# EAGLE board v1 (EAGLE 7.7.0)
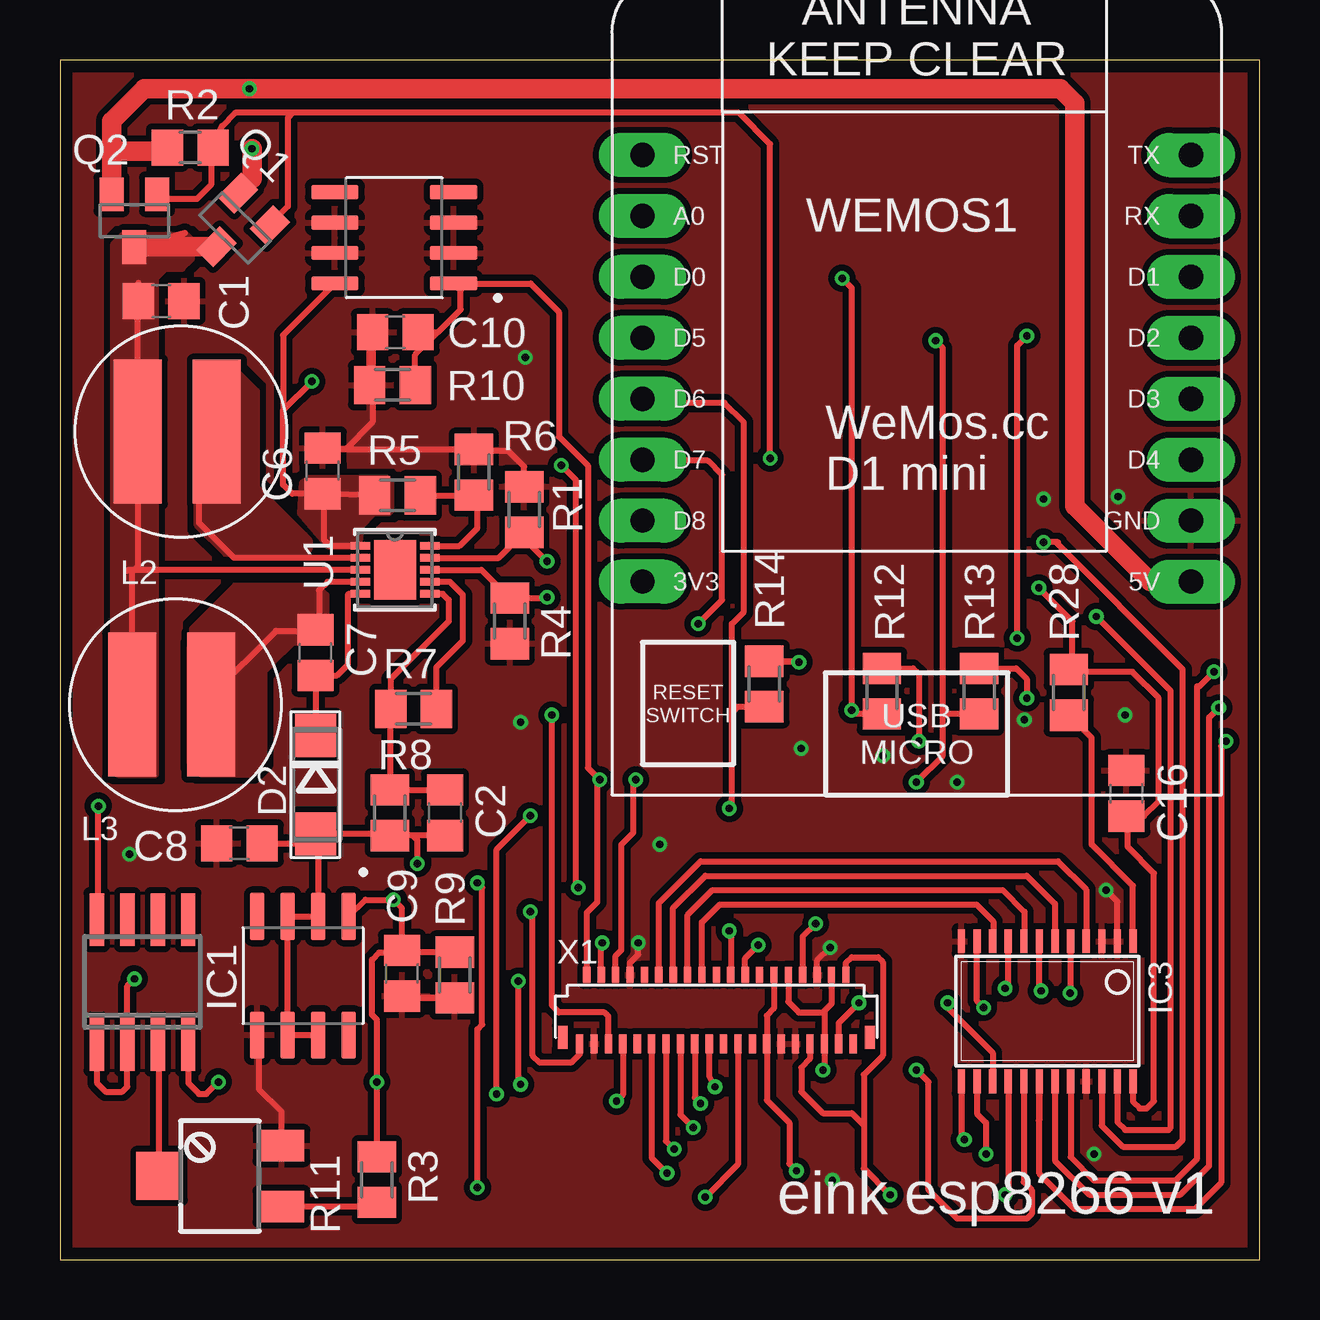
[diagram p0: board, top side]
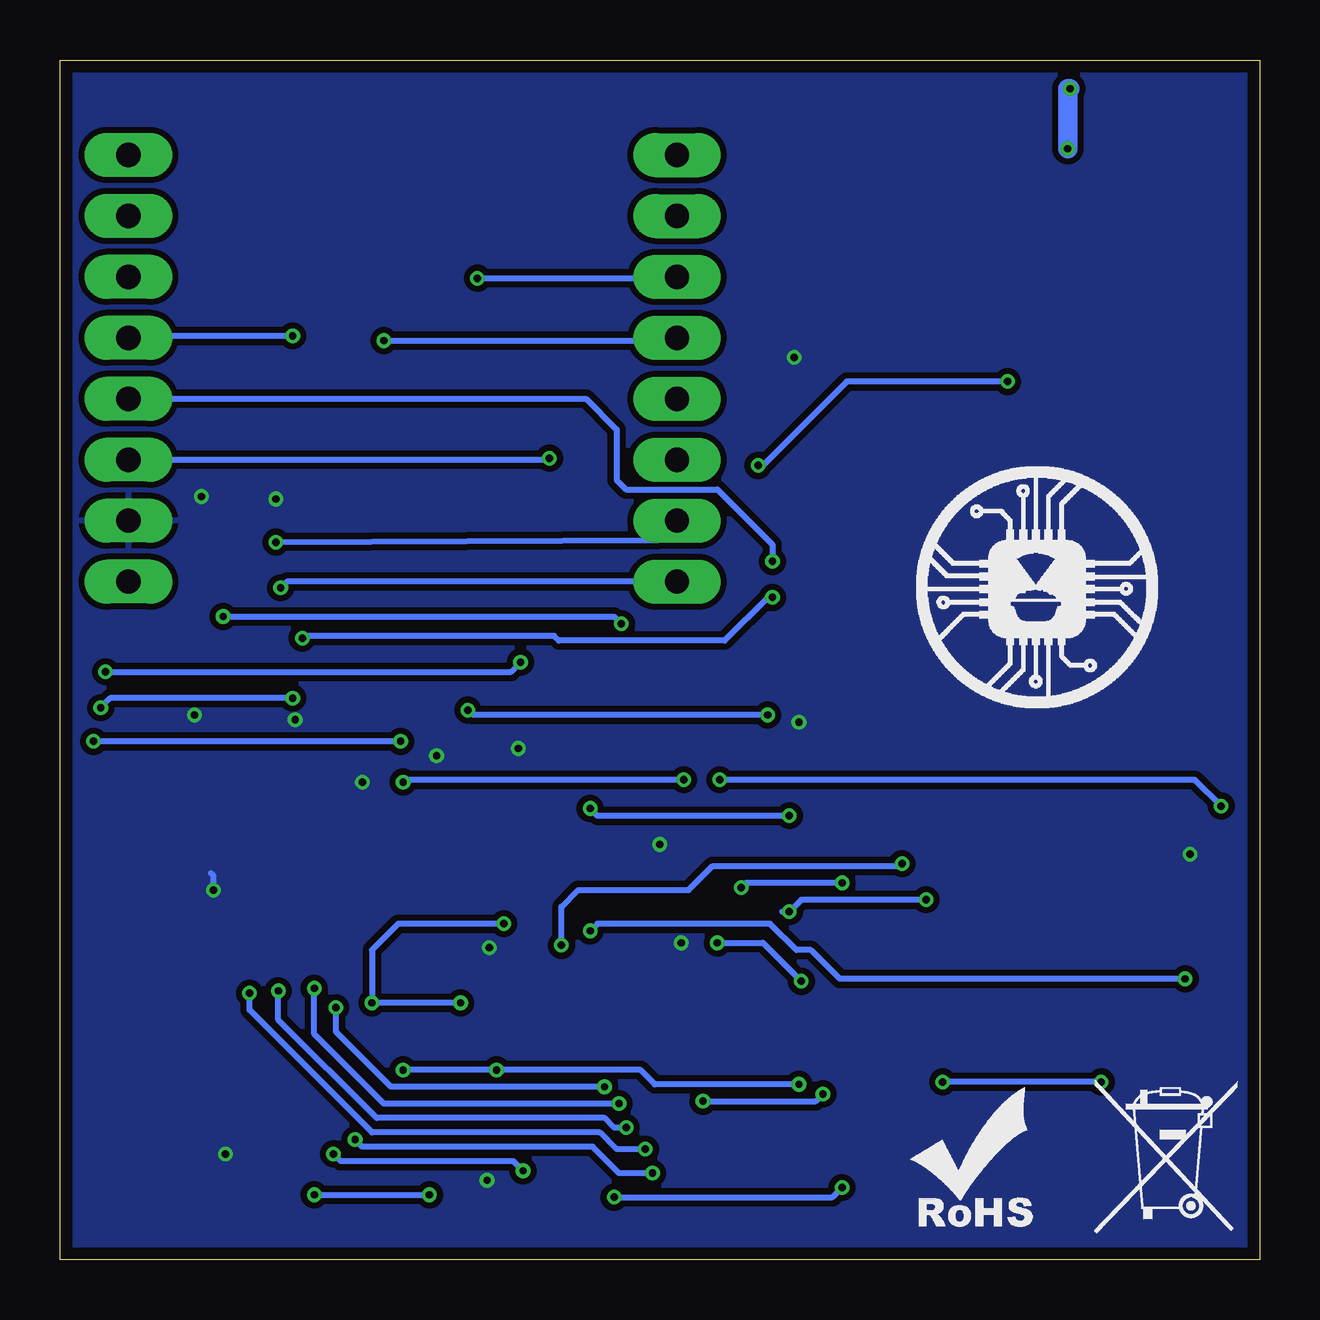
[diagram p1: board, bottom side, seen from below]

Size 50 x 50 mm. Coordinates in mm from the lower left corner, seen from the top.
Outline: 0,0 50,0 50,50 0,50 0,0
Copper layers (1*16): Top 0.035mm / dielectric 1.6mm / Bottom 0.035mm
Design rules "Elecrow_2-layer_PCB_eagle_rule": minimum track width 6mil, minimum drill 12mil, track to track 6mil, track to pad 6mil, pad to pad 6mil, via to via 8mil, smd to smd 0mil, copper to edge 20mil, drill to drill 10mil, minimum pad ring 6mil, minimum via ring 6mil, stop-mask expansion 0mil, vias tented up to drill 100mil, thermal gap 10mil

## Footprints (pad centres in the part's own frame; a part is rotated, then mirrored left to right if it is on the bottom)
C0805 = smd 1.3 x 1.5: 1 -0.95,0; 2 0.95,0
DO-214AC = smd 1.8 x 1.7: A 2.05,0; C -2.05,0
SO08 = smd 0.6 x 2.2: 1 -1.905,-2.6; 2 -0.635,-2.6; 3 0.635,-2.6; 4 1.905,-2.6; 5 1.905,2.6; 6 0.635,2.6; 7 -0.635,2.6; 8 -1.905,2.6
TSSOP24 = smd 0.305 x 0.991: 1 -3.575,-2.918; 2 -2.925,-2.918; 3 -2.275,-2.918; 4 -1.625,-2.918; 5 -0.975,-2.918; 6 -0.325,-2.918; 7 0.325,-2.918; 8 0.975,-2.918; 9 1.625,-2.918; 10 2.275,-2.918; 11 2.925,-2.918; 12 3.575,-2.918; 13 3.575,2.918; 14 2.925,2.918; 15 2.275,2.918; 16 1.625,2.918; 17 0.975,2.918; 18 0.325,2.918; 19 -0.325,2.918; 20 -0.975,2.918; 21 -1.625,2.918; 22 -2.275,2.918; 23 -2.925,2.918; 24 -3.575,2.918
SRN6045 = smd 2 x 6: P$1 1.5,0; P$2 -1.8,0
SOT23 = smd 1 x 1.4: 1 -0.95,-1.1; 2 0.95,-1.1; 3 0,1.1
M0805 = smd 1.3 x 1.6: 1 -0.95,0; 2 0.95,0
R0805 = smd 1.3 x 1.5: 1 -0.95,0; 2 0.95,0
SM-42/43X = smd 1.3 x 1.9: 1 -1.27,-2.55; 3 1.27,-2.55 | smd 2 x 1.9: 2 0,2.55
DFN-10_DD = smd 0.813 x 0.305: 1 -1.448,1; 2 -1.448,0.5; 3 -1.448,0; 4 -1.448,-0.5; 5 -1.448,-1; 6 1.448,-1; 7 1.448,-0.5; 8 1.448,0; 9 1.448,0.5; 10 1.448,1 | smd 1.753 x 2.489: 11 0,0
SOIC127P600X175-8N = smd 1.97 x 0.6: 1 -2.475,1.905; 2 -2.475,0.635; 3 -2.475,-0.635; 4 -2.475,-1.905; 5 2.475,-1.905; 6 2.475,-0.635; 7 2.475,0.635; 8 2.475,1.905
WEMOS-D1-MINI = drill 1.016 pad 1.829 long: 3V3 -10.16,-10.16; 5V 12.7,-10.16; A0 -10.16,5.08; D0 -10.16,2.54; D1 12.7,2.54; D2 12.7,0; D3 12.7,-2.54; D4 12.7,-5.08; D5 -10.16,0; D6 -10.16,-2.54; D7 -10.16,-5.08; D8 -10.16,-7.62; GND 12.7,-7.62; RESET -10.16,7.62; RX 12.7,5.08; TX 12.7,7.62
FH26-39S-0.3SHW = smd 0.3 x 0.8: 1 0,0; 3 0.6,0; 5 1.2,0; 7 1.8,0; 9 2.4,0; 11 3,0; 13 3.6,0; 15 4.2,0; 17 4.8,0; 19 5.4,0; 21 6,0; 23 6.6,0; 25 7.2,0; 27 7.8,0; 29 8.4,0; 31 9,0; 33 9.6,0; 35 10.2,0; 37 10.8,0; 39 11.4,0 | smd 0.3 x 0.65: 2 0.3,2.875; 4 0.9,2.875; 6 1.5,2.875; 8 2.1,2.875; 10 2.7,2.875; 12 3.3,2.875; 14 3.9,2.875; 16 4.5,2.875; 18 5.1,2.875; 20 5.7,2.875; 22 6.3,2.875; 24 6.9,2.875; 26 7.5,2.875; 28 8.1,2.875; 30 8.7,2.875; 32 9.3,2.875; 34 9.9,2.875; 36 10.5,2.875; 38 11.1,2.875 | smd 0.4 x 0.95: P1 -0.7,0.275; P2 12.1,0.275

## Placement (x,y rotation side)
C1  4.7uF  [C0805]  4.22,39.95 0 top
C2  10pF  [C0805]  16.05,18.62 90 top
C6  4.7uF  [C0805]  10.95,32.87 90 top
C7  1uF  [C0805]  10.65,25.3 270 top
C8  4.7uF  [C0805]  7.48,17.35 180 top
C9  4.7uF  [C0805]  14.25,11.93 270 top
C10  4.7uF  [C0805]  13.98,38.65 180 top
C16  100nF  [C0805]  44.45,19.43 270 top
D2  B240A  [DO-214AC]  10.65,19.79 270 top
IC1  LM358D  [SO08]  3.44,11.57 0 top
IC3  PCA9555PW  [TSSOP24]  41.15,10.35 180 top
L2  SRN6045-100M  [SRN6045]  5.04,34.51 0 top
L3  SRN6045-100M  [SRN6045]  4.81,23.13 0 top
Q1  BSS84  [SOT23]  7.3,43 135 top
Q2  BSS84  [SOT23]  3.1,43.3 180 top
R1  10K  [M0805]  19.35,31.26 90 top
R2  100k  [R0805]  5.43,46.35 180 top
R3  47k  [M0805]  13.21,3.33 270 top
R4  10K  [M0805]  18.75,26.62 270 top
R5  200k  [M0805]  14.07,31.85 0 top
R6  12k  [M0805]  17.25,32.82 90 top
R7  10k  [M0805]  14.74,22.95 0 top
R8  160k  [M0805]  13.75,18.62 90 top
R9  10k  [M0805]  16.45,11.86 90 top
R10  10k  [M0805]  13.86,36.45 0 top
R11  [SM-42/43X]  6.68,3.48 90 top
R12  47k  [M0805]  34.26,23.69 270 top
R13  47k  [M0805]  38.31,23.69 270 top
R14  47k  [M0805]  29.36,23.99 270 top
R28  10k  [M0805]  42.05,23.64 90 top
U1  LT3463EDD  [DFN-10_DD]  13.96,28.75 0 top
U$1  LM78L15ACMX  [SOIC127P600X175-8N]  13.93,42.59 180 top
U$2  LM79L15ACDG  [SOIC127P600X175-8N]  10.13,11.83 270 top
U$3  LOGO_10X10_SILK  [LOGO2_10X10_SILK]  14.3,23 0 bottom
U$4  LOGO_NO_TRASHNO_TRASH  [LOGO_ROHS_NO_TRASH]  6.9,1.1 0 bottom
U$5  LOGO_NO_TRASHROHS  [LOGO_ROHS_SYM]  15,1.3 0 bottom
WEMOS1  [WEMOS-D1-MINI]  34.44,38.42 0 top
X1  ED060SC4_EINK  [FH26-39S-0.3SHW]  21.66,8.99 0 top

## Library data of the parts
C1 C2 C6-C10 C16 R1-R10 R12-R14 R28 = rcl
D2 = Keyboard v0_5; DESCRIPTION: DIODE SMD General Purpose 400V 1A 1.4W RoHS DO-214AC; FOOTPRINT: DO-214AC; LINK: http://www.digikey.com/product-detail/en/B240A-13-F/B240A-FDICT-ND/717810; MFG: DIGIKEY; MFG_PN: B240A-FDICT-ND; PART_TYPE: DIODE; PRICE: 0.11; VENDOR: DIODES; VENDOR_PART_NUMBER: B240A-13-F
IC1 = linear
IC3 = micro-philips; MPN: PCA9555PW; OC_FARNELL: 1408297; OC_NEWARK: 63K6069
L2 L3 = Keyboard v0_5; DESCRIPTION: power inductor 10uH 2.5A 58.6 mohm; FOOTPRINT: SRN6045; LINK: http://www.digikey.com/product-detail/en/SRN6045-100M/SRN6045-100MTR-ND/2756120; MFG: DIGIKEY; MFG_PN: SRN6045-100MTR-ND; PART_TYPE: IND; PRICE: 0.15; TOLLERANCE: ±20%; VENDOR: BOURNS; VENDOR_PART_NUMBER: SRN6045-100M
Q1 Q2 = transistor-small-signal
R11 = pot
U1 = LT3463EDD; AVAILABILITY: Unavailable; DESCRIPTION: LT3463 - Dual Micropower DC/DC Converters with Schottky Diodes; MF: Linear Technology; MP: LT3463EDD; PACKAGE: DFN-10 Linear Technology; PRICE: None
U$1 U$2 = SOIC127P600X175-8N
U$3-U$5 = JKW_CHIP
WEMOS1 = esp8266modules
X1 = hirose-flex

## Nets
3.3V: C16.2 IC3.24 R28.2 WEMOS1.3V3
CKV: IC3.16 X1.33 X1.38
CL: R12.2 WEMOS1.D0 X1.5
D0: IC3.4 X1.12
D1: IC3.5 X1.13
D2: IC3.6 X1.14
D3: IC3.7 X1.15
D4: IC3.8 X1.16
D5: IC3.9 X1.17
D6: IC3.10 X1.18
D7: IC3.11 X1.19
EN_NEG: R4.1 U1.8 WEMOS1.D2
EN_P: Q1.1 Q2.1 R2.1 WEMOS1.D4
EN_POS: R1.1 U1.9 WEMOS1.D3
GMODE: IC3.14 X1.27 X1.28
GND: C1.2 C6.2 C8.2 C9.2 C10.2 C16.1 IC3.2 IC3.3 IC3.12 IC3.21 R1.2 R4.2 R6.2 R9.1 R10.1 R11.3 U$1.2 U$1.3 U$1.6 U$1.7 U$2.5 WEMOS1.GND X1.3 X1.8 X1.29 X1.31 X1.34
I2C_SCL: IC3.22 WEMOS1.D8
I2C_SDA: IC3.23 WEMOS1.D7
KPD_INT: IC3.1 R28.1
LE: R13.2 WEMOS1.D5 X1.6
N$1: L2.P$1 U1.2
N$2: C7.1 L3.P$1 U1.4
N$3: R5.2 R6.1 U1.10
N$7: C7.2 D2.C U1.5
N$8: C2.2 R7.1 R8.2 U1.6
N$9: R7.2 U1.7
N$15: IC1.1 IC1.2 X1.22
N$16: Q1.2 Q2.2 R2.2 WEMOS1.5V
N$17: R3.2 R11.1
N$18: IC1.3 R11.2
N$20: IC3.20 R14.1
N$21: IC3.19 R13.1
N$22: IC3.18 R12.1
OE: R14.2 WEMOS1.D6 X1.7
SPH: IC3.13 X1.11
SPV: IC3.15 X1.32 X1.37
V_15: C10.1 IC1.8 R10.2 U$1.1 X1.2
V_20: C6.1 R5.1 U1.1 U$1.8 X1.23
V_-15: C9.1 IC1.4 R3.1 R9.2 U$2.1 X1.1
V_-20: C2.1 C8.1 D2.A R8.1 U$2.2 U$2.3 U$2.6 U$2.7 X1.24
VDD: IC3.17 X1.4 X1.30 X1.35 X1.36
VIN: C1.1 L2.P$2 L3.P$2 Q1.3 Q2.3 U1.3

## Tracks (layer width: path | path; a pad name or v marks a point on that pad's centre or on a via)
3.3V  (via drill 0.3)
  Top 0.254: IC3.24 44.73,6.58 45,6.3 45.3,6.3 45.6,6.6 45.6,16.1 44.5,17.2 44.5,18.43 C16.2 45.18,18.48 45.8,19.1 45.8,23.4 44.7,24.5 42.14,24.5 R28.2 42.2,24.74 42.2,26.6 v40.8,28
  Bottom 0.254: WEMOS1.3V3 40.54,28.26 v40.8,28
CKV  (via drill 0.3)
  Top 0.254: IC3.16 39.52,2.83 v39.4,2.7 | X1.38 32.76,12.36 33,12.6 34.1,12.6 34.3,12.4 34.3,8.5 33.5,7.7 33.5,5.6 | 34.3,3 v34.6,2.7 33.5,3.8 33.5,5.6 | X1.33 31.26,8.36 30.9,8 30.9,7 31.8,6.1 33,6.1 33.5,5.6
  Bottom 0.254: v39.4,2.7 v34.6,2.7
CL  (via drill 0.3)
  Top 0.254: R12.2 33.06,22.74 33,22.8 v33,22.9 33,40.5 v32.6,40.9 | X1.5 22.86,10.14 22.7,10.3 20.8,10.3 20.5,10.6 v20.5,22.7
  Bottom 0.254: v32.6,40.9 24.34,40.9 WEMOS1.D0 | v20.5,22.7 32.8,22.7 v33,22.9
D0
  Top 0.254: X1.12 24.96,14.86 26.7,16.6 41.6,16.6 42.77,15.43 IC3.4
D1  (via drill 0.3)
  Top 0.254: X1.13 25.26,4.94 v25.6,4.6 | v42.1,11.1 42.12,11.12 IC3.5
  Bottom 0.254: v25.6,4.6 26.8,4.6 27.5,5.3 37,5.3 42.1,10.4 v42.1,11.1
D2
  Top 0.254: X1.14 25.56,14.66 26.9,16 40.3,16 41.48,14.82 IC3.6
D3  (via drill 0.3)
  Top 0.254: X1.15 25.86,6.04 v26.4,5.5 | v40.9,11.2 40.83,11.28 IC3.7
  Bottom 0.254: v26.4,5.5 26.9,5.5 27.3,5.9 36.8,5.9 40.9,10 v40.9,11.2
D4
  Top 0.254: X1.16 26.16,14.36 27.2,15.4 39.3,15.4 40.2,14.5 40.2,13.29 IC3.8
D5  (via drill 0.3)
  Top 0.254: X1.17 26.46,6.74 v26.7,6.5 | v39.4,11.3 39.52,11.43 IC3.9
  Bottom 0.254: v26.7,6.5 36.5,6.5 39.4,9.4 v39.4,11.3
D6
  Top 0.254: X1.18 26.76,14.06 27.5,14.8 38.2,14.8 38.9,14.1 38.9,13.29 IC3.10
D7  (via drill 0.3)
  Top 0.254: X1.19 27.06,7.64 v27.3,7.2 | v38.5,10.5 38.23,10.78 IC3.11
  Bottom 0.254: v27.3,7.2 36.2,7.2 38.5,9.5 v38.5,10.5
EN_NEG  (via drill 0.3)
  Top 0.254: U1.8 17.57,28.75 R4.1 20.27,27.57 v20.3,27.6 | v39.9,25.9 39.9,38.1 v40.3,38.5 | 47.06,38.5 WEMOS1.D2
  Bottom 0.254: v20.3,27.6 20.5,27.6 22.3,25.8 29.2,25.8 29.4,26 39.8,26 v39.9,25.9 | v40.3,38.5 47.06,38.5 WEMOS1.D2
EN_P  (via drill 0.3)
  Top 0.254: v29.6,33.4 29.6,46.5 28.3,47.8 9.7,47.8 | 9.7,47.8 7.3,47.8 6.75,47.25 R2.1 6.35,46.35 6.3,46.3 6.3,44.8 5.7,44.2 4.25,44.2 Q2.1 | Q1.1 8.75,43.15 9.5,43.9 9.5,47.6 9.7,47.8
  Bottom 0.254: WEMOS1.D4 29.66,33.34 v29.6,33.4
EN_POS  (via drill 0.3)
  Top 0.254: U1.9 18.29,29.25 R1.1 19.35,30.05 v20.3,29.1
  Bottom 0.254: WEMOS1.D3 28.08,35.88 26.8,34.6 26.8,32.5 26.4,32.1 22.6,32.1 20.3,29.8 v20.3,29.1
GMODE  (via drill 0.3)
  Top 0.254: X1.28 29.76,10.46 29.46,10.16 X1.27 29.46,6.64 30.4,5.7 30.4,4 v30.7,3.7 | IC3.14 38.23,6.08 38.6,5.7 v38.6,4.4
  Bottom 0.254: v30.7,3.7 31.1,4.1 38.3,4.1 v38.6,4.4
GND  (via drill 0.3)
  Top 0.254: 11.9,33.77 R6.2 17.32,33.7 18.7,33.7 19.35,33.05 R1.2 | 11.9,33.77 11,33.77 C6.2 | R9.1 14.51,10.91 14.5,10.9 16.2,10.9 16.3,11 | R10.1 12.91,38.53 C10.2 13.03,34.9 11.9,33.77 | R11.3 9.23,6.17 8.3,7.1 8.3,9.28 U$2.5 | IC3.2 44.08,14.93 v43.6,15.4 | X1.34 31.56,12.46 v32.1,13 | X1.8 23.76,12.36 24.1,12.7 v24.1,13.2
  Bottom 0.254: v43.6,15.4 43.6,16 43.7,16.1
  other vias: 43.1,4.4 2.9,16.9 25,17.3 44.4,22.7 40.2,22.5 44.1,31.8 41,31.7 37.4,19.9 34.3,21 30.9,21.3 19.2,22.4 19.4,37.6 32.2,3.3
  pour Top (isolate 0.254, rank 2): 0.3,0.3 49.5,0.5 49.5,49.5 0.5,49.5 0.5,0.5
  pour Bottom (isolate 0.254): 49.5,0.5 49.5,49.5 0.5,49.5 0.5,0.5
I2C_SCL  (via drill 0.3)
  Top 0.254: 41.6,29.9 41.5,29.9 | 41.5,29.9 v41,29.9 | IC3.22 43.42,5.58 44.3,4.7 46.5,4.7 46.8,5 46.8,24.6 41.5,29.9
  Bottom 0.254: v41,29.9 25.08,30 WEMOS1.D8
I2C_SDA  (via drill 0.3)
  Top 0.254: IC3.23 44.08,5.72 44.4,5.4 46.2,5.4 46.3,5.5 46.3,23.7 v43.2,26.8 | v26.6,26.5 27.6,27.5 27.6,32.7 27,33.3 24.32,33.3 WEMOS1.D7
  Bottom 0.254: v43.2,26.8 26.9,26.8 v26.6,26.5
KPD_INT
  Top 0.254: 42.14,22.6 R28.1 43,21.74 43,17.3 44.73,15.57 IC3.1
LE  (via drill 0.3)
  Top 0.254: 36.8,22.7 36.8,21 v35.7,19.9 | R13.2 36.84,22.74 36.8,22.7 | 36.8,22.7 36.8,38 v36.5,38.3 | X1.6 23.16,12.66 23.4,12.9 23.4,17.3 23.9,17.8 23.9,19.9 v24,20
  Bottom 0.254: v36.5,38.3 24.4,38.3 WEMOS1.D5 | v24,20 35.6,20 v35.7,19.9
N$1
  Top 0.254: U1.2 7.25,29.25 5.8,30.7 5.8,33.77 L2.P$1
  pour Top (no thermals): 9.8,29.4 6.9,29.4 5.7,30.6 5.7,37.1 7.3,37.1 8.2,36.2 8.2,32.2 10.2,30.2 10.4,30 10.4,29.6 10.1,29.3 9.6,29.3
N$2
  Top 0.254: L3.P$1 6.31,23.51 9,26.2 10.6,26.2 C7.1 10.8,26.4 10.8,27.9 11.15,28.25 U1.4
  pour Top (no thermals): 5.5,25.3 5.5,26.3 7.3,28.1 10.7,28.1 11.1,27.7 11.1,25.9 10.9,25.7 9.7,25.7 9.3,25.3 8.5,24.5 8.5,23 8.5,20.8 7.9,20.2 5.9,20.2 5.4,20.7 5.4,25.5
N$3
  Top 0.254: R5.2 17.23,31.85 R6.1 17.4,31.72 17.4,30.5 16.65,29.75 U1.10
N$7
  Top 0.254: U1.5 12.05,27.75 12,27.7 12,24.8 11.55,24.35 C7.2 D2.C
N$8
  Top 0.254: C2.2 R8.2 13.79,19.61 R7.1 13.79,24.19 16.2,26.6 16.2,27.5 15.95,27.75 U1.6
N$9
  Top 0.254: R7.2 15.69,24.69 16.8,25.8 16.8,27.7 16.25,28.25 U1.7
N$15  (via drill 0.3)
  Top 0.254: v3.1,11.7 2.81,11.4 IC1.2 2.81,7.21 2.6,7 1.9,7 1.53,7.37 IC1.1 | v27.9,13.7 27.96,13.64 X1.22
  Bottom 0.254: v3.1,11.7 17.5,11.7 18.7,12.9 19.3,12.9 20.4,14 27.6,14 v27.9,13.7
N$16  (via drill 0.3)
  Top 0.813: WEMOS1.5V 45.44,28.26 42.3,31.4 42.3,48.2 41.7,48.8 8.9,48.8 v7.9,48.8 3.5,48.8 2.15,47.45 2.15,46.2 | 2.15,46.2 Q2.2 | R2.2 4.33,46.2 2.15,46.2 | Q1.2 8,45.04 v8,46.3
  Bottom 0.813: v8,46.3 8,48.8 v7.9,48.8
N$17
  Top 0.254: R11.1 13.2,2.21 | 13.2,2.21 13.61,2.21 13.8,2.4 | R3.2 13.21,2.22 13.2,2.21
N$18
  Top 0.254: R11.2 4.13,8.91 IC1.3
N$20  (via drill 0.3)
  Top 0.254: R14.1 29.9,24.94 | 29.9,24.94 30.76,24.94 v30.8,24.9 29.94,24.9 29.9,24.94 | IC3.20 42.12,4.28 43.1,3.3 46.5,3.3 47.4,4.2 47.4,23.9 47.5,23.9 v48.1,24.5
  Bottom 0.254: v48.1,24.5 31.2,24.5 v30.8,24.9
N$21  (via drill 0.3)
  Top 0.254: R13.1 39.86,24.64 40.3,24.2 v40.3,23.4 | IC3.19 41.48,4.12 42.9,2.7 46.7,2.7 47.9,3.9 47.9,22.6 v48.3,23
  Bottom 0.254: v40.3,23.4 47.9,23.4 v48.3,23
N$22  (via drill 0.3)
  Top 0.254: 40.8,5.8 40.83,5.83 IC3.18 40.83,3.58 42.3,2.1 47.3,2.1 48.4,3.2 48.4,21.4 v48.6,21.6 | R12.1 35.56,24.64 35.8,24.4 v35.8,21.6
  Bottom 0.254: v35.8,21.6 v48.6,21.6
OE  (via drill 0.3)
  Top 0.254: 28,22.8 28,18.9 v27.9,18.8 | 28,22.8 28,26.5 28.5,27 28.5,34.9 27.7,35.7 24.46,35.7 WEMOS1.D6 | R14.2 28.24,23.04 28,22.8 | X1.7 23.46,6.86 v23.2,6.6 | v18.2,6.9 18.2,17.1 v19.6,18.5
  Bottom 0.254: v23.2,6.6 18.5,6.6 v18.2,6.9 | v19.6,18.5 27.6,18.5 v27.9,18.8
SPH  (via drill 0.3)
  Top 0.254: IC3.13 37.6,7.41 37.6,5.1 v37.7,5 | X1.11 24.66,4.24 v25.3,3.6
  Bottom 0.254: v25.3,3.6 26.7,3.6 27.8,4.7 37.4,4.7 v37.7,5
SPV  (via drill 0.3)
  Top 0.254: X1.32 30.96,13.46 v31.5,14 | IC3.15 38.88,8.62 37,10.5 v37,10.7 | X1.37 32.46,9.86 v33.3,10.7
  Bottom 0.254: v31.5,14 35.9,14 37,12.9 v37,10.7 v33.3,10.7
V_15  (via drill 0.3)
  Top 0.254: 22.4,20.1 v22.5,20 | C10.1 15.75,38.65 | 15.75,38.65 16.7,39.6 16.7,40.39 U$1.1 19.61,40.69 20.8,39.5 20.8,34.3 22,33.1 22,20.5 v22.5,20 | R10.2 14.81,37.71 15.75,38.65 | IC1.8 1.6,14.23 v1.6,18.9 | X1.2 21.96,14.46 22.4,14.9 22.4,19.9 v22.5,20
  Bottom 0.254: v1.6,18.9 2.7,20 v22.5,20
V_20  (via drill 0.3)
  Top 0.254: U1.1 11.25,29.75 11,30 11,31.87 C6.1 | R5.1 C6.1 | C6.1 9.68,31.92 9.3,32.3 9.3,35.4 | 9.3,35.4 v10.5,36.6 | v21.6,15.5 21.5,15.6 21.5,32.5 v20.9,33.1 | 9.3,35.4 9.3,38.53 U$1.8 | X1.23 28.26,3.96 v26.9,2.6 | v17.4,3 17.4,9.6 17.6,9.8 17.6,15.5 v17.4,15.7
  Bottom 0.254: v10.5,36.6 17.2,36.6 20.7,33.1 v20.9,33.1 | v26.9,2.6 17.8,2.6 v17.4,3 | v17.4,15.7 21.4,15.7 v21.6,15.5
  pour Top (no thermals): 12.2,29.7 11.2,29.7 10,31.1 10.1,32.4 10.4,32.6 13.6,32.6 13.8,32.4 13.8,31.2 13.7,31.1 13.1,31.1 12.5,30.5 12.5,30
V_-15  (via drill 0.3)
  Top 0.254: U$2.1 12.73,15 v13.9,15 14.25,14.65 C9.1 | R9.2 14.32,12.81 C9.1 | R3.1 v13.21,7.4 13.21,9.99 13,10.2 13,12.5 13.3,12.8 14.17,12.8 C9.1 | IC1.4 5.34,7.36 5.8,6.9 6.1,6.9 v6.6,7.4 | X1.1 21.66,8.56 21.3,8.2 20,8.2 19.7,8.5 19.7,14.4 v19.6,14.5
  Bottom 0.254: v13.9,15 19.1,15 v19.6,14.5 19.9,14.5 | v6.6,7.4 v13.21,7.4
V_-20  (via drill 0.3)
  Top 0.254: D2.A 13.68,17.74 R8.1 14.7,17.67 | C2.1 14.7,17.67 | D2.A 10.77,17.62 U$2.2 U$2.3 U$2.6 U$2.7 | C8.1 10.26,17.35 D2.A | X1.24 28.56,12.56 v29.1,13.1 | v14.9,16.5 14.9,17.47 14.7,17.67
  Bottom 0.254: v29.1,13.1 29.1,14.7 28.4,15.4 23.8,15.4 22.8,16.4 15,16.4 v14.9,16.5
VDD  (via drill 0.3)
  Top 0.254: 31.74,7.96 v31.8,7.9 31.86,7.96 X1.35 31.86,10.3 | IC3.17 40.17,3.23 40.5,2.9 40.5,1.9 40.3,1.7 37.4,1.7 36.2,2.9 36.2,7.4 v35.7,7.9 | X1.4 22.56,13.16 v22.6,13.2 | v19.1,11.6 19.1,7.4 v19.2,7.3 | X1.36 32.16,10.66 31.86,10.36 31.86,10.3 | X1.30 30.36,10.74 30.8,10.3 31.86,10.3
  Bottom 0.254: v35.7,7.9 v31.8,7.9 25.8,7.9 25.2,7.3 v19.2,7.3 | v22.6,13.2 20.7,13.2 v19.1,11.6
VIN
  Top 0.254: U1.3 3.1,28.75 | 3.1,28.75 2.85,28.75 2.8,28.7 | 3.1,28.75 3.24,28.89 L2.P$2 3.24,39.92 C1.1 3.27,40.71 | L3.P$2 3.01,28.66 3.1,28.75 | Q2.3 5.2,42.8 4.6,42.2 4.5,42.2
  Top 0.813: Q1.3 3.12,42.22 Q2.3
  pour Top (no thermals): 4,20.2 4,40.9 4.4,41.3 5.1,41.3 5.5,41.7 5.5,42.5 5.3,42.7 2.6,42.7 2.2,42.3 2.2,20.4 2.4,20.2 3.9,20.2

## Text on the board
tNames: eink esp8266 v1